# EAGLE board CT_schematic (EAGLE 7.6.0)

Size 100 x 80 mm. Coordinates in mm from the lower left corner, seen from the top.
Outline: 0,0 100,0 100,80 0,80 0,0
Copper layers (1*16): Top 0.035mm / dielectric 1.5mm / Bottom 0.035mm
Design rules "default": minimum track width 10mil, minimum drill 24mil, track to track 8mil, track to pad 8mil, pad to pad 8mil, via to via 8mil, smd to smd 8mil, copper to edge 40mil, drill to drill 8mil, minimum pad ring 10mil, minimum via ring 8mil, stop-mask expansion 4mil, vias tented up to drill 0mil, thermal gap 10mil

## Footprints (pad centres in the part's own frame; a part is rotated, then mirrored left to right if it is on the bottom)
C0603 = smd 0.8 x 0.8: 1 -0.762,0; 2 0.762,0
C0402 = smd 0.5 x 0.5: 1 -0.508,0; 2 0.508,0
C0805 = smd 1.2 x 1.3: 1 -1.016,0; 2 1.016,0
C1210 = smd 1.2 x 2.5: 1 -1.524,0; 2 1.524,0
2220 = smd 1.85 x 5.5: 1 -2.55,0; 2 2.55,0
EXV-9H = smd 3.505 x 1.676: 1 -2.857,0; 2 2.857,0
L0603 = smd 0.8 x 0.8: 1 -0.762,0; 2 0.762,0
L1210 = smd 1.2 x 2.5: 1 -1.524,0; 2 1.524,0
DR1040 = smd 1.6 x 3.2: 1 -4.458,0; 2 4.458,0
PJ-037B_PACKAGE = drill 3.7 square: 1 12,0 | drill 3.2 square: 2 6,0
R0603 = smd 0.8 x 0.8: 1 -0.762,0; 2 0.762,0
WLCSP64 = smd 0.34 x 0.34: A1 -1.75,1.75; A2 -1.25,1.75; A3 -0.75,1.75; A4 -0.25,1.75; A5 0.25,1.75; A6 0.75,1.75; A7 1.25,1.75; A8 1.75,1.75; B1 -1.75,1.25; B2 -1.25,1.25; B3 -0.75,1.25; B4 -0.25,1.25; B5 0.25,1.25; B6 0.75,1.25; B7 1.25,1.25; B8 1.75,1.25; C1 -1.75,0.75; C2 -1.25,0.75; C3 -0.75,0.75; C4 -0.25,0.75; C5 0.25,0.75; C6 0.75,0.75; C7 1.25,0.75; C8 1.75,0.75; D1 -1.75,0.25; D2 -1.25,0.25; D3 -0.75,0.25; D4 -0.25,0.25; D5 0.25,0.25; D6 0.75,0.25; D7 1.25,0.25; D8 1.75,0.25; E1 -1.75,-0.25; E2 -1.25,-0.25; E3 -0.75,-0.25; E4 -0.25,-0.25; E5 0.25,-0.25; E6 0.75,-0.25; E7 1.25,-0.25; E8 1.75,-0.25; F1 -1.75,-0.75; F2 -1.25,-0.75; F3 -0.75,-0.75; F4 -0.25,-0.75; F5 0.25,-0.75; F6 0.75,-0.75; F7 1.25,-0.75; F8 1.75,-0.75; G1 -1.75,-1.25; G2 -1.25,-1.25; G3 -0.75,-1.25; G4 -0.25,-1.25; G5 0.25,-1.25; G6 0.75,-1.25; G7 1.25,-1.25; G8 1.75,-1.25; H1 -1.75,-1.75; H2 -1.25,-1.75; H3 -0.75,-1.75; H4 -0.25,-1.75; H5 0.25,-1.75; H6 0.75,-1.75; H7 1.25,-1.75; H8 1.75,-1.75
SOT-23-8 = smd 0.4 x 1.2: 1 -0.975,-1.3; 2 -0.325,-1.3; 3 0.325,-1.3; 4 0.975,-1.3; 5 0.975,1.3; 6 0.325,1.3; 7 -0.325,1.3; 8 -0.975,1.3
182-009-MALE = drill 1.194 pad 1.524 octagon: 1 -5.537,10.923; 2 -2.769,10.923; 3 0,10.923; 4 2.769,10.923; 5 5.537,10.923; 6 -4.153,8.08; 7 -1.384,8.08; 8 1.384,8.08; 9 4.153,8.08 | hole 3.048: -12.446,9.501; 12.446,9.501
SSOP-20 = smd 1.651 x 0.432: 1 -3.48,2.925; 2 -3.48,2.275; 3 -3.48,1.625; 4 -3.48,0.975; 5 -3.48,0.325; 6 -3.48,-0.325; 7 -3.48,-0.975; 8 -3.48,-1.625; 9 -3.48,-2.275; 10 -3.48,-2.925; 11 3.48,-2.925; 12 3.48,-2.275; 13 3.48,-1.625; 14 3.48,-0.975; 15 3.48,-0.325; 16 3.48,0.325; 17 3.48,0.975; 18 3.48,1.625; 19 3.48,2.275; 20 3.48,2.925
QFN-32 = smd 0.6 x 0.3: 1 -2.3,1.75; 2 -2.3,1.25; 3 -2.3,0.75; 4 -2.3,0.25; 5 -2.3,-0.25; 6 -2.3,-0.75; 7 -2.3,-1.25; 8 -2.3,-1.75; 17 2.3,-1.75; 18 2.3,-1.25; 19 2.3,-0.75; 20 2.3,-0.25; 21 2.3,0.25; 22 2.3,0.75; 23 2.3,1.25; 24 2.3,1.75 | smd 0.3 x 0.6: 9 -1.75,-2.3; 10 -1.25,-2.3; 11 -0.75,-2.3; 12 -0.25,-2.3; 13 0.25,-2.3; 14 0.75,-2.3; 15 1.25,-2.3; 16 1.75,-2.3; 25 1.75,2.3; 26 1.25,2.3; 27 0.75,2.3; 28 0.25,2.3; 29 -0.25,2.3; 30 -0.75,2.3; 31 -1.25,2.3; 32 -1.75,2.3 | smd 3.2 x 3.2: EXP 0,0
SJ-43515TS-SMT-TR = smd 2.2 x 3: 1 0.6,-7.4; 4 3.4,-7.4 | smd 3 x 3: 2 12.8,-7.4; 5 17,-3 | smd 2 x 3: 3 5.3,0; 6 2.5,0 | drill 1.8: P$7 4.5,-3.69; P$8 11.54,-3.69
WM-64PC = drill 0.6 pad 1: 1 -1,0.95; 2 -1,-0.95
XB24CZ7UIS-004 = smd 2.84 x 1.52: 1 -10,6; 2 -10,4; 3 -10,2; 4 -10,0; 5 -10,-2; 6 -10,-4; 7 -10,-6; 8 -10,-8; 9 -10,-10; 10 -10,-12; 11 -10,-14; 12 -10,-16; 13 -10,-18; 21 10,-18; 22 10,-16; 23 10,-14; 24 10,-12; 25 10,-10; 26 10,-8; 27 10,-6; 28 10,-4; 29 10,-2; 30 10,0; 31 10,2; 32 10,4; 33 10,6; 34 10,8; 35 10,10; 36 10,12; 37 10,14 | smd 1.52 x 2.84: 14 -6,-19.68; 15 -4,-19.68; 16 -2,-19.68; 17 0,-19.68; 18 2,-19.68; 19 4,-19.68; 20 6,-19.68
ABLS-25.000MHZ-B2F-T = smd 5.6 x 2.8: 1 -3.81,0; 2 5.69,0
ASEK = smd 1.4 x 1: 1 -1.1,-0.8; 2 1.1,-0.8; 3 1.1,0.8; 4 -1.1,0.8
ASFL1 = smd 1.7 x 1.5: 1 -1.27,-1.1; 2 1.27,-1.1; 3 1.27,1.1; 4 -1.27,1.1
WSON-8 = smd 0.3 x 0.6: 1 -0.75,0; 2 0.05,0; 3 0.85,0; 4 1.65,0; 5 1.65,3.8; 6 0.85,3.8; 7 0.05,3.8; 8 -0.75,3.8 | smd 3 x 2.6: PAD 0.45,1.9
QFN-16_EP = smd 0.805 x 0.3: 1 -1.452,0.75; 2 -1.452,0.25; 3 -1.452,-0.25; 4 -1.452,-0.75; 9 1.452,-0.75; 10 1.452,-0.25; 11 1.452,0.25; 12 1.452,0.75 | smd 0.3 x 0.805: 5 -0.75,-1.452; 6 -0.25,-1.452; 7 0.25,-1.452; 8 0.75,-1.452; 13 0.75,1.452; 14 0.25,1.452; 15 -0.25,1.452; 16 -0.75,1.452 | smd 1.55 x 1.55: 17 0,0
SON-6 = smd 0.55 x 0.3: 1 -0.355,0.5 | smd 0.52 x 0.3: 2 -0.37,0; 3 -0.37,-0.5; 4 0.37,-0.5; 5 0.37,0; 6 0.37,0.5
SW_4-1437565-2 = smd 1.4 x 2.1: 1 -2.23,4.55; 2 -2.23,-4.55; 3 2.23,4.55; 4 2.23,-4.55
LGM67K-G1J2-24-Z = smd 0.8 x 1.4: A -2,0; C 0,0
NC7SZ125M5X = smd 1.3 x 0.7: 1 -1.3,0.95; 2 -1.3,0; 3 -1.3,-0.95; 4 1.3,-0.95; 5 1.3,0.95

## Placement (x,y rotation side)
C1  1e-06  [C0603]  -15.24,113.03 0 top  (outside the outline)
C2  1e-07  [C0603]  -19.05,113.03 0 top  (outside the outline)
C3  1e-07  [C0603]  -22.86,113.03 0 top  (outside the outline)
C4  1e-07  [C0603]  -26.67,113.03 0 top  (outside the outline)
C5  1e-07  [C0603]  -30.48,113.03 0 top  (outside the outline)
C6  1e-07  [C0603]  -34.29,113.03 0 top  (outside the outline)
C7  4.7e-06  [C0603]  -90.17,107.95 0 top  (outside the outline)
C8  1e-08  [C0603]  -38.1,113.03 0 top  (outside the outline)
C9  1e-06  [C0603]  -41.91,113.03 0 top  (outside the outline)
C10  1e-11  [C0402]  -57.15,118.11 0 top  (outside the outline)
C11  1e-11  [C0402]  -60.96,118.11 0 top  (outside the outline)
C12  1e-07  [C0402]  -64.77,118.11 0 top  (outside the outline)
C13  1e-06  [C0603]  -45.72,113.03 0 top  (outside the outline)
C14  1e-06  [C0603]  -49.53,113.03 0 top  (outside the outline)
C15  1e-06  [C0603]  -53.34,113.03 0 top  (outside the outline)
C16  4.7e-06  [C0805]  -88.9,100.33 0 top  (outside the outline)
C17  1e-06  [C0603]  -57.15,113.03 0 top  (outside the outline)
C18  1e-06  [C0603]  -60.96,113.03 0 top  (outside the outline)
C19  1e-06  [C0603]  -64.77,113.03 0 top  (outside the outline)
C20  1e-06  [C0603]  -68.58,113.03 0 top  (outside the outline)
C21  1e-06  [C0603]  -72.39,113.03 0 top  (outside the outline)
C22  1e-06  [C0603]  -76.2,113.03 0 top  (outside the outline)
C23  1e-06  [C0603]  -80.01,113.03 0 top  (outside the outline)
C24  1e-07  [C0402]  -68.58,118.11 0 top  (outside the outline)
C25  1e-07  [C0402]  -72.39,118.11 0 top  (outside the outline)
C26  1e-07  [C0402]  -76.2,118.11 0 top  (outside the outline)
C27  1e-07  [C0402]  -80.01,118.11 0 top  (outside the outline)
C28  1e-06  [C0603]  -83.82,113.03 0 top  (outside the outline)
C29  1e-05  [C0805]  -93.98,100.33 0 top  (outside the outline)
C30  1e-07  [C0402]  -83.82,118.11 0 top  (outside the outline)
C31  4.7e-11  [C0402]  -53.34,118.11 0 top  (outside the outline)
C32  8.2e-12  [C0603]  -93.98,107.95 0 top  (outside the outline)
C33  1e-08  [C0402]  -87.63,118.11 0 top  (outside the outline)
C34  1e-08  [C0402]  -91.44,118.11 0 top  (outside the outline)
C35  1e-08  [C0402]  -95.25,118.11 0 top  (outside the outline)
C36  1e-05  [C1210]  -59.69,101.6 0 top  (outside the outline)
C37  1e-05  [C0805]  -15.24,107.95 0 top  (outside the outline)
C38  1e-05  [C0805]  -20.32,107.95 0 top  (outside the outline)
C39  1e-06  [C0603]  -87.63,113.03 0 top  (outside the outline)
C40  1e-07  [C0402]  -15.24,123.19 0 top  (outside the outline)
C41  6.8e-05  [2220]  -83.82,81.28 0 top  (outside the outline)
C42  1e-07  [C0402]  -19.05,123.19 0 top  (outside the outline)
C43  0.0001  [EXV-9H]  -90.17,92.71 0 top  (outside the outline)
C44  0.0001  [EXV-9H]  -17.78,101.6 0 top  (outside the outline)
C45  1e-08  [C0402]  -22.86,123.19 0 top  (outside the outline)
C46  1e-08  [C0402]  -26.67,123.19 0 top  (outside the outline)
F1  240.0  [L0603]  -91.44,113.03 0 top  (outside the outline)
I1  1.5e-05  [L1210]  -66.04,101.6 0 top  (outside the outline)
I2  5.2e-06  [DR1040]  -38.1,81.28 0 top  (outside the outline)
J1  PJ-037B  [PJ-037B_PACKAGE]  -83.82,68.58 0 top  (outside the outline)
R2  1000.0  [R0603]  -95.25,113.03 0 top  (outside the outline)
R4  4700.0  [R0603]  -15.24,118.11 0 top  (outside the outline)
R5  4700.0  [R0603]  -19.05,118.11 0 top  (outside the outline)
R6  10000.0  [R0603]  -66.04,107.95 0 top  (outside the outline)
R7  120.0  [R0603]  -22.86,118.11 0 top  (outside the outline)
R8  100000.0  [R0603]  -25.4,107.95 0 top  (outside the outline)
R9  100000.0  [R0603]  -30.48,107.95 0 top  (outside the outline)
R10  100000.0  [R0603]  -35.56,107.95 0 top  (outside the outline)
R11  100000.0  [R0603]  -40.64,107.95 0 top  (outside the outline)
R12  1270.0  [R0603]  -26.67,118.11 0 top  (outside the outline)
R13  1270.0  [R0603]  -30.48,118.11 0 top  (outside the outline)
R14  100000.0  [R0603]  -45.72,107.95 0 top  (outside the outline)
R15  200.0  [R0603]  -34.29,118.11 0 top  (outside the outline)
R16  1000.0  [R0603]  -38.1,118.11 0 top  (outside the outline)
R17  20000.0  [R0603]  -71.12,107.95 0 top  (outside the outline)
R18  91000.0  [R0603]  -76.2,107.95 0 top  (outside the outline)
R19  300000.0  [R0603]  -50.8,107.95 0 top  (outside the outline)
R20  10000.0  [R0603]  -81.28,107.95 0 top  (outside the outline)
R21  10000.0  [R0603]  -86.36,107.95 0 top  (outside the outline)
R22  9100.0  [R0603]  -41.91,118.11 0 top  (outside the outline)
R23  680000.0  [R0603]  -55.88,107.95 0 top  (outside the outline)
R24  120000.0  [R0603]  -60.96,107.95 0 top  (outside the outline)
U1  stm32f103rcy7  [WLCSP64]  -60.96,92.71 0 top  (outside the outline)
U2  MAX3051EKA+T  [SOT-23-8]  -71.12,100.33 0 top  (outside the outline)
U3  182-009-113R531  [182-009-MALE]  -62.23,6.35 0 top  (outside the outline)
U4  MAX3218EAP+T  [SSOP-20]  -74.93,80.01 0 top  (outside the outline)
U5  182-009-113R531  [182-009-MALE]  -36.83,45.72 0 top  (outside the outline)
U6  SGTL5000XNAA3  [QFN-32]  -64.77,81.28 0 top  (outside the outline)
U7  SJ-43515TS-SMT-TR  [SJ-43515TS-SMT-TR]  -78.74,49.53 0 top  (outside the outline)
U8  SJ-43515TS-SMT-TR  [SJ-43515TS-SMT-TR]  -39.37,71.12 0 top  (outside the outline)
U9  SJ-43515TS-SMT-TR  [SJ-43515TS-SMT-TR]  -67.31,71.12 0 top  (outside the outline)
U10  WM-64PCT  [WM-64PC]  -50.8,81.28 0 top  (outside the outline)
U11  XB24CZ7UIS-004  [XB24CZ7UIS-004]  -25.4,21.59 0 top  (outside the outline)
U12  ABLS-25.000MHZ-B2F-T  [ABLS-25.000MHZ-B2F-T]  -36.83,101.6 0 top  (outside the outline)
U13  ASEK-32.768KHz-ECST  [ASEK]  -81.28,92.71 0 top  (outside the outline)
U14  ASFL-24.57MHZ-NCS  [ASFL1]  -48.26,92.71 0 top  (outside the outline)
U15  LP3878SDX-ADJ/NOPB  [WSON-8]  -30.48,91.44 0 top  (outside the outline)
U16  LTC3601EUD#PBF  [QFN-16_EP]  -46.99,118.11 0 top  (outside the outline)
U17  TPS3895ADRYR  [SON-6]  -29.21,121.92 0 top  (outside the outline)
U18  4-1437565-2  [SW_4-1437565-2]  -27.94,82.55 0 top  (outside the outline)
U19  Q65110A2395  [LGM67K-G1J2-24-Z]  -48.26,101.6 0 top  (outside the outline)
U20  nc7sz125m5x  [NC7SZ125M5X]  -76.2,100.33 0 top  (outside the outline)
U21  nc7sz125m5x  [NC7SZ125M5X]  -82.55,100.33 0 top  (outside the outline)

## Library data of the parts
C1-C46 F1 I1 I2 J1 R2 R4-R24 U1-U21 = circuit_tree

## Nets
CLK_CRYSTAL_U1_D7: C10.1 U1.D7 U12.1
CLK_CRYSTAL_U1_D8: C11.1 U1.D8 U12.2
CLK_U1_B8: U1.B8 U13.3
CLK_U6_21: U6.21 U14.3
GND: C1.2 C2.2 C3.2 C4.2 C5.2 C6.2 C7.2 C8.2 C9.2 C10.2 C11.2 C12.2 C13.2 C14.2 C15.2 C24.2 C25.2 C26.2 C27.2 C28.2 C29.2 C30.2 C31.2 C32.2 C33.2 C34.2 C35.2 C36.2 C37.2 C38.2 C39.2 C41.1 C41.2 C42.2 C43.2 C44.2 C45.2 C46.2 J1.2 R2.2 R6.2 R8.2 R13.2 R16.2 R17.2 R19.2 R22.2 R24.2 U1.A7 U1.B1 U1.E7 U1.F5 U1.H2 U2.2 U3.5 U4.5 U4.17 U4.20 U5.5 U6.1 U6.3 U6.7 U6.EXP U8.1 U9.1 U10.2 U11.1 U11.11 U11.13 U11.22 U11.35 U13.2 U14.2 U15.3 U15.PAD U16.1 U16.9 U16.17 U17.2 U19.C U20.1 U20.3 U21.1 U21.3
NET_U1_A6: R6.1 U1.A6
NET_U1_C7: R5.1 U1.C7 U21.4
NET_U1_G8: C8.1 C9.1 F1.1 U1.F7 U1.G8
NET_U1_H7: U19.A
NET_U1_H8: U18.3 U18.4
NET_U2_6: R7.2 U2.6
NET_U2_8: R8.1 U2.8
NET_U3_2: R7.2 U2.6 U3.2
NET_U3_3: R7.1 U2.7 U3.3
NET_U4_1: I1.1 U4.1
NET_U4_2: R9.1 U4.2
NET_U4_3: R10.1 U4.3
NET_U4_4: R11.1 U4.4
NET_U4_15: C15.1 U4.15
NET_U4_16: C16.2 U4.16
NET_U4_18: C16.1 U4.18
NET_U4_19: C14.1 U4.19
NET_U5_2: U4.12 U5.2
NET_U5_3: U4.14 U5.3
NET_U5_7: U4.11 U5.7
NET_U5_8: U4.13 U5.8
NET_U6_10: C27.1 U6.10
NET_U6_29: R12.1 U6.29
NET_U6_31: R13.1 U6.31
NET_U7_1: U6.4 U7.1
NET_U7_2: U6.2 U7.2
NET_U7_5: U6.6 U7.5
NET_U8_2: C18.1 U8.2
NET_U8_5: C17.1 U8.5
NET_U8_11: C18.2
NET_U8_12: C17.2
NET_U9_2: C20.1 C21.1 U9.2
NET_U9_5: C19.1 U9.5
NET_U9_13: C20.2 C21.2
NET_U9_14: C19.2
NET_U10_1: C22.1 C23.1 C28.1 U6.16 U10.1
NET_U10_15: C22.2 C23.2
NET_U11_6: R4.1 U11.6 U20.4
NET_U15_1: C35.1 U15.1
NET_U15_6: R15.2 R16.1 U15.6
NET_U15_8: R14.1 U15.8
NET_U16_3: C40.2 I2.1 U16.3 U16.4
NET_U16_6: C40.1 U16.6
NET_U16_7: C39.1 U16.7 U16.12
NET_U16_10: R19.1 U16.10
NET_U16_11: R17.1 R18.1 U16.11
NET_U16_14: U16.14
NET_U16_ATNET_3: I2.2 R18.2
NET_U17_1: R21.1 R22.1 U17.1
NET_U17_3: R23.2 R24.1 U17.3
NET_U17_4: R20.1 U17.4 U20.2 U21.2
NET_U18_1: R2.1 U18.1 U18.2
PROC_CAN_RX: U1.C1 U2.4
PROC_CAN_TX: U1.B6 U2.1
PROC_I2S2_CK: U1.G1 U6.24
PROC_I2S2_SD: U1.F1 U6.26
PROC_I2S2_WS: U1.G2 U6.23
PROC_SPI1_MISO: U1.B4 U11.17
PROC_SPI1_MOSI: U1.A5 U11.16
PROC_SPI1_NSS: U1.C3 U11.15
PROC_SPI1_SCK: U1.A4 U11.14
PROC_UART4_RX: U1.B3 U4.9
PROC_UART4_TX: U1.A2 U4.7
VCC_S1_13V0: C36.1 C38.1 C43.1 C44.1 J1.1 R14.2 U15.4 U16.15 U16.16
VCC_TIER1_1V2: C24.1 C37.1 R15.1 U6.30 U15.5
VCC_TIER1_3V3: C1.1 C2.1 C3.1 C4.1 C5.1 C6.1 C7.1 C12.1 C13.1 C25.1 C26.1 C29.1 C30.1 C31.1 C32.1 C33.1 C34.1 C41.2 C42.1 C45.1 C46.1 F1.2 I1.2 I2.2 R4.2 R5.2 R9.2 R10.2 R11.2 R12.2 R18.2 R20.2 R21.2 R23.1 U1.A1 U1.A8 U1.C6 U1.G6 U1.H1 U2.3 U4.6 U6.5 U6.20 U11.2 U11.27 U13.4 U14.4 U16.8 U17.6 U20.5 U21.5

## Tracks (layer width: path | path; a pad name or v marks a point on that pad's centre or on a via)
CLK_CRYSTAL_U1_D7  (2 unrouted)
CLK_CRYSTAL_U1_D8  (2 unrouted)
CLK_U1_B8  (1 unrouted)
CLK_U6_21  (1 unrouted)
GND  (83 unrouted)
NET_U1_A6  (1 unrouted)
NET_U1_C7  (2 unrouted)
NET_U1_G8  (4 unrouted)
NET_U1_H8  (1 unrouted)
NET_U2_6  (1 unrouted)
NET_U2_8  (1 unrouted)
NET_U3_2  (2 unrouted)
NET_U3_3  (2 unrouted)
NET_U4_1  (1 unrouted)
NET_U4_2  (1 unrouted)
NET_U4_3  (1 unrouted)
NET_U4_4  (1 unrouted)
NET_U4_15  (1 unrouted)
NET_U4_16  (1 unrouted)
NET_U4_18  (1 unrouted)
NET_U4_19  (1 unrouted)
NET_U5_2  (1 unrouted)
NET_U5_3  (1 unrouted)
NET_U5_7  (1 unrouted)
NET_U5_8  (1 unrouted)
NET_U6_10  (1 unrouted)
NET_U6_29  (1 unrouted)
NET_U6_31  (1 unrouted)
NET_U7_1  (1 unrouted)
NET_U7_2  (1 unrouted)
NET_U7_5  (1 unrouted)
NET_U8_2  (1 unrouted)
NET_U8_5  (1 unrouted)
NET_U9_2  (2 unrouted)
NET_U9_5  (1 unrouted)
NET_U9_13  (1 unrouted)
NET_U10_1  (4 unrouted)
NET_U10_15  (1 unrouted)
NET_U11_6  (2 unrouted)
NET_U15_1  (1 unrouted)
NET_U15_6  (2 unrouted)
NET_U15_8  (1 unrouted)
NET_U16_3  (3 unrouted)
NET_U16_6  (1 unrouted)
NET_U16_7  (2 unrouted)
NET_U16_10  (1 unrouted)
NET_U16_11  (2 unrouted)
NET_U16_ATNET_3  (1 unrouted)
NET_U17_1  (2 unrouted)
NET_U17_3  (2 unrouted)
NET_U17_4  (3 unrouted)
NET_U18_1  (2 unrouted)
PROC_CAN_RX  (1 unrouted)
PROC_CAN_TX  (1 unrouted)
PROC_I2S2_CK  (1 unrouted)
PROC_I2S2_SD  (1 unrouted)
PROC_I2S2_WS  (1 unrouted)
PROC_SPI1_MISO  (1 unrouted)
PROC_SPI1_MOSI  (1 unrouted)
PROC_SPI1_NSS  (1 unrouted)
PROC_SPI1_SCK  (1 unrouted)
PROC_UART4_RX  (1 unrouted)
PROC_UART4_TX  (1 unrouted)
VCC_S1_13V0  (8 unrouted)
VCC_TIER1_1V2  (4 unrouted)
VCC_TIER1_3V3  (50 unrouted)